# EAGLE board 00A-022 FRDM Protoboard (EAGLE 6.3)
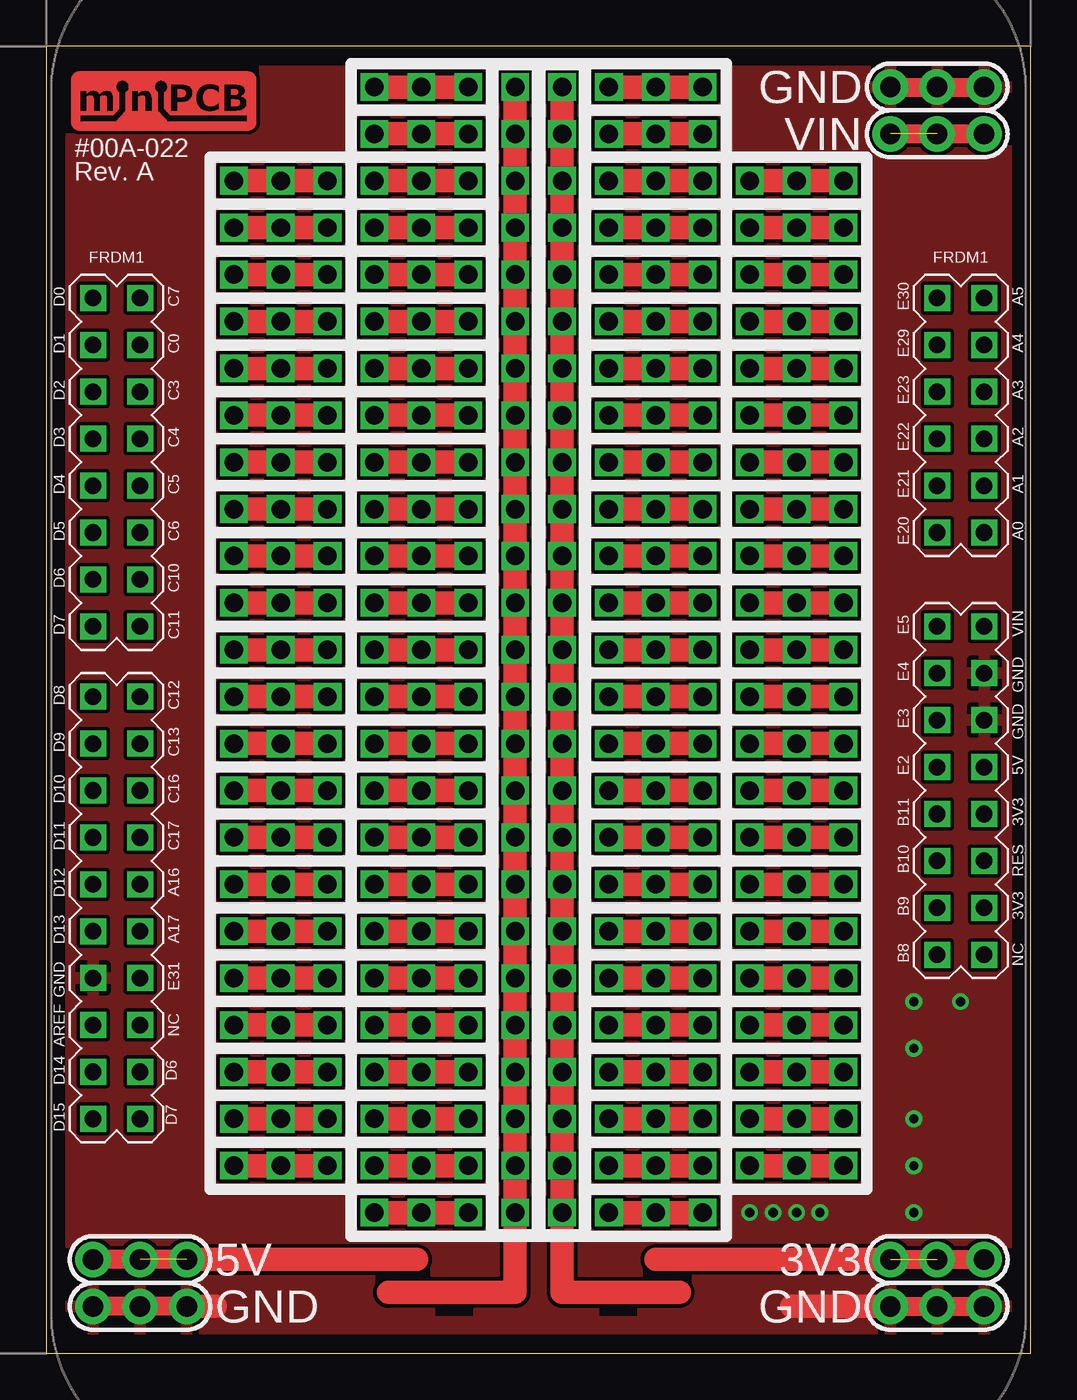
[diagram p0: board, top side]
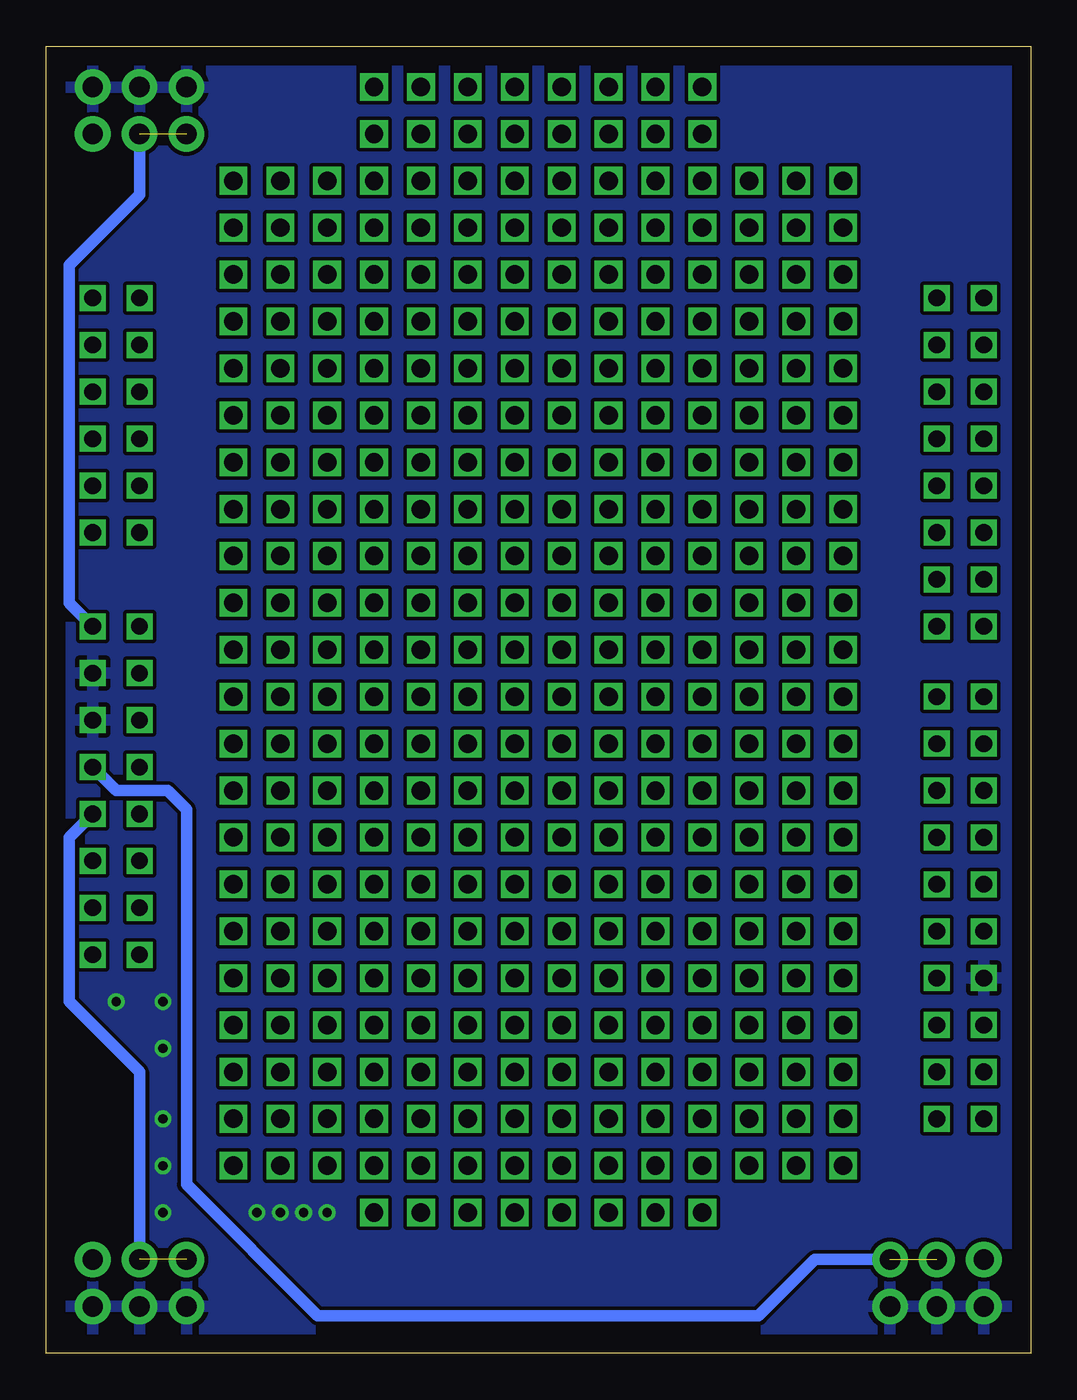
[diagram p1: board, bottom side, seen from below]

Size 53.32 x 70.79 mm. Coordinates in mm from the lower left corner, seen from the top.
Outline: 0,0 53.32,0 53.32,70.79 0,70.79 0,0
Copper layers (1*16): Top 0.035mm / dielectric 1.5mm / Bottom 0.035mm
Design rules "default": minimum track width 10mil, minimum drill 24mil, track to track 8mil, track to pad 8mil, pad to pad 8mil, via to via 8mil, smd to smd 8mil, copper to edge 40mil, drill to drill 8mil, minimum pad ring 10mil, minimum via ring 8mil, stop-mask expansion 4mil, vias tented up to drill 0mil, thermal gap 10mil
tRestrict: area 30,2 to 32,2.3; area 21.1,2 to 23.1,2.3

## Footprints (pad centres in the part's own frame; a part is rotated, then mirrored left to right if it is on the bottom)
FRDM_KL25Z_NORMAL = drill 0.9 square: 3V3 24.13,-15.24; 5V 24.13,-7.62; A0 24.13,5.08; A1 24.13,7.62; A2 24.13,10.16; A3 24.13,12.7; A4 24.13,15.24; A5 24.13,17.78; AREF -24.13,-21.59; D0 -24.13,17.78; D1 -24.13,15.24; D2 -24.13,12.7; D3 -24.13,10.16; D4 -24.13,7.62; D5 -24.13,5.08; D6 -24.13,2.54; D7 -24.13,0; D8 -24.13,-3.81; D9 -24.13,-6.35; D10 -24.13,-8.89; D11 -24.13,-11.43; D12 -24.13,-13.97; D13 -24.13,-16.51; D14 -24.13,-24.13; D15 -24.13,-26.67; GND0 24.13,-2.54; GND1 24.13,-5.08; GND2 -24.13,-19.05; NC1 24.13,-17.78; NC2 -21.59,-21.59; P3V3 24.13,-10.16; PTA16 -21.59,-13.97; PTA17 -21.59,-16.51; PTB8 21.59,-17.78; PTB9 21.59,-15.24; PTB10 21.59,-12.7; PTB11 21.59,-10.16; PTC0 -21.59,15.24; PTC3 -21.59,12.7; PTC4 -21.59,10.16; PTC5 -21.59,7.62; PTC6 -21.59,5.08; PTC7 -21.59,17.78; PTC10 -21.59,2.54; PTC11 -21.59,0; PTC12 -21.59,-3.81; PTC13 -21.59,-6.35; PTC16 -21.59,-8.89; PTC17 -21.59,-11.43; PTD6 -21.59,-24.13; PTD7 -21.59,-26.67; PTE2 21.59,-7.62; PTE3 21.59,-5.08; PTE4 21.59,-2.54; PTE5 21.59,0; PTE20 21.59,5.08; PTE21 21.59,7.62; PTE22 21.59,10.16; PTE23 21.59,12.7; PTE29 21.59,15.24; PTE30 21.59,17.78; PTE31 -21.59,-19.05; RESET 24.13,-12.7; VIN 24.13,0
PINS_1-3P_VALUE = drill 1.1 pad 1.93: 1 0,0; 2 2.54,0; 3 5.08,0

## Placement (x,y rotation side)
FRDM1  FRDM-KL25ZNORMAL  [FRDM_KL25Z_NORMAL]  26.67,39.37 0 top
P57  3V3  [PINS_1-3P_VALUE]  45.72,5.08 0 top
P58  5V  [PINS_1-3P_VALUE]  7.62,5.08 180 top
P59  VIN  [PINS_1-3P_VALUE]  45.72,66.04 0 top
P102  GND  [PINS_1-3P_VALUE]  45.72,2.54 0 top
P103  GND  [PINS_1-3P_VALUE]  7.62,2.54 180 top
P114  GND  [PINS_1-3P_VALUE]  45.72,68.58 0 top
U$1  MINIPCB_LOGO  [MINIPCB-LOGO]  6.35,67.82 0 top

## Library data of the parts
FRDM1 = nolan; AVAILABILITY: In Stock; DESCRIPTION: KL1x, KL2x, mbed-Enabled Development Freedom Kinetis ARM® Cortex®-M0+ MCU 32-Bit Embedded Evaluation Board; MF: NXP USA; MP: FRDM-KL25Z; PACKAGE: 0805 Freescale Semiconductor; PRICE: None; PURCHASE-URL: https://pricing.snapeda.com/search/part/FRDM-KL25Z/?ref=eda
P57-P59 P102 P103 P114 U$1 = nolan

## Nets
GND: FRDM1.GND0 FRDM1.GND1 FRDM1.GND2 P102.1 P102.2 P102.3 P103.1 P103.2 P103.3 P114.1 P114.2 P114.3
N$57: FRDM1.P3V3 P57.1 P57.2 P57.3
N$58: FRDM1.5V P58.1 P58.2 P58.3
N$59: FRDM1.VIN P59.1 P59.2 P59.3

## Tracks (layer width: path | path; a pad name or v marks a point on that pad's centre or on a via)
GND  (via drill 0.5)
  Top 1.27: P102.1 40.39,2.54 | P103.1 9.14,2.54
  other vias: 38.1,7.62 39.37,7.62 40.64,7.62 41.91,7.62 46.99,7.62 46.99,10.16 46.99,12.7 46.99,19.05 49.53,19.05 46.99,16.51
  pour Top: 1.27,1.27 52.07,1.27 52.07,69.85 1.27,69.85
  pour Bottom: 1.27,1.27 52.07,1.27 52.07,69.85 1.27,69.85
N$1  (via drill 1)
  Top 1.27: v27.94,68.58 v27.94,66.04 v27.94,7.62 27.94,3.3 34.29,3.3
N$2  (via drill 1)
  other vias: 27.94,63.5
N$3  (via drill 1)
  other vias: 27.94,60.96
N$4  (via drill 1)
  other vias: 27.94,58.42
N$5  (via drill 1)
  other vias: 27.94,55.88
N$6  (via drill 1)
  other vias: 27.94,53.34
N$7  (via drill 1)
  other vias: 27.94,50.8
N$8  (via drill 1)
  other vias: 27.94,48.26
N$9  (via drill 1)
  other vias: 27.94,45.72
N$10  (via drill 1)
  other vias: 27.94,43.18
N$11  (via drill 1)
  other vias: 27.94,40.64
N$12  (via drill 1)
  other vias: 27.94,38.1
N$13  (via drill 1)
  other vias: 27.94,35.56
N$14  (via drill 1)
  other vias: 27.94,33.02
N$15  (via drill 1)
  other vias: 27.94,30.48
N$16  (via drill 1)
  other vias: 27.94,27.94
N$17  (via drill 1)
  other vias: 27.94,25.4
N$18  (via drill 1)
  other vias: 27.94,22.86
N$19  (via drill 1)
  other vias: 27.94,20.32
N$20  (via drill 1)
  Top 1.27: v25.4,68.58 v25.4,66.04 v25.4,7.62 25.4,3.3 18.54,3.3
N$21  (via drill 1)
  other vias: 27.94,15.24
N$22  (via drill 1)
  other vias: 27.94,12.7
N$23  (via drill 1)
  other vias: 27.94,10.16
N$25  (via drill 1)
  other vias: 25.4,63.5
N$26  (via drill 1)
  other vias: 27.94,17.78
N$27  (via drill 1)
  other vias: 25.4,60.96
N$28  (via drill 1)
  other vias: 25.4,58.42
N$29  (via drill 1)
  other vias: 25.4,55.88
N$30  (via drill 1)
  other vias: 25.4,53.34
N$31  (via drill 1)
  other vias: 25.4,50.8
N$32  (via drill 1)
  other vias: 25.4,48.26
N$33  (via drill 1)
  other vias: 25.4,45.72
N$34  (via drill 1)
  other vias: 25.4,43.18
N$35  (via drill 1)
  other vias: 25.4,40.64
N$36  (via drill 1)
  other vias: 25.4,38.1
N$37  (via drill 1)
  other vias: 25.4,35.56
N$38  (via drill 1)
  other vias: 25.4,33.02
N$39  (via drill 1)
  other vias: 25.4,30.48
N$40  (via drill 1)
  other vias: 25.4,27.94
N$41  (via drill 1)
  other vias: 25.4,25.4
N$42  (via drill 1)
  other vias: 25.4,22.86
N$43  (via drill 1)
  other vias: 25.4,20.32
N$44  (via drill 1)
  other vias: 25.4,15.24
N$45  (via drill 1)
  other vias: 25.4,12.7
N$46  (via drill 1)
  other vias: 25.4,10.16
N$48  (via drill 1)
  other vias: 25.4,17.78
N$49  (via drill 1)
  Top 1.27: v30.48,63.5 v35.56,63.5
N$50  (via drill 1)
  other vias: 33.02,63.5
N$51  (via drill 1)
  Top 1.27: v38.1,63.5 v43.18,63.5
N$52  (via drill 1)
  Top 1.27: v17.78,63.5 v22.86,63.5
N$53  (via drill 1)
  Top 1.27: v30.48,60.96 v35.56,60.96
N$54  (via drill 1)
  other vias: 33.02,60.96
N$55  (via drill 1)
  other vias: 40.64,63.5
N$56  (via drill 1)
  other vias: 20.32,63.5
N$57  (1 unrouted)
  Top 1.27: P57.1 33.02,5.08
  Bottom 0.61: FRDM1.P3V3 52.07,27.94 52.07,19.05 48.26,15.24 P57.2
N$58  (1 unrouted)
  Top 1.27: P58.1 20.07,5.08
  Bottom 0.61: FRDM1.5V 49.53,30.48 46.74,30.48 45.72,29.46 45.72,9.14 38.61,2.03 14.73,2.03 11.68,5.08 P58.1
N$59  (1 unrouted)
  Bottom 0.61: FRDM1.VIN 52.07,40.64 52.07,58.93 48.26,62.74 P59.2
N$60  (via drill 1)
  Top 1.27: v30.48,58.42 v35.56,58.42
N$61  (via drill 1)
  other vias: 33.02,58.42
N$62  (via drill 1)
  Top 1.27: v38.1,60.96 v43.18,60.96
N$63  (via drill 1)
  Top 1.27: v17.78,60.96 v22.86,60.96
N$64  (via drill 1)
  Top 1.27: v30.48,55.88 v35.56,55.88
N$65  (via drill 1)
  other vias: 33.02,55.88
N$66  (via drill 1)
  other vias: 40.64,60.96
N$67  (via drill 1)
  other vias: 20.32,60.96
N$68  (via drill 1)
  Top 1.27: v30.48,53.34 v35.56,53.34
N$69  (via drill 1)
  other vias: 33.02,53.34
N$70  (via drill 1)
  Top 1.27: v38.1,58.42 v43.18,58.42
N$71  (via drill 1)
  Top 1.27: v17.78,58.42 v22.86,58.42
N$72  (via drill 1)
  Top 1.27: v30.48,50.8 v35.56,50.8
N$73  (via drill 1)
  other vias: 33.02,50.8
N$74  (via drill 1)
  other vias: 40.64,58.42
N$75  (via drill 1)
  Top 1.27: v30.48,48.26 v35.56,48.26
N$76  (via drill 1)
  other vias: 33.02,48.26
N$77  (via drill 1)
  Top 1.27: v38.1,55.88 v43.18,55.88
N$78  (via drill 1)
  Top 1.27: v30.48,45.72 v35.56,45.72
N$79  (via drill 1)
  other vias: 33.02,45.72
N$80  (via drill 1)
  other vias: 40.64,55.88
N$81  (via drill 1)
  Top 1.27: v30.48,43.18 v35.56,43.18
N$82  (via drill 1)
  other vias: 33.02,43.18
N$83  (via drill 1)
  Top 1.27: v38.1,53.34 v43.18,53.34
N$84  (via drill 1)
  Top 1.27: v30.48,40.64 v35.56,40.64
N$85  (via drill 1)
  other vias: 33.02,40.64
N$86  (via drill 1)
  other vias: 40.64,53.34
N$87  (via drill 1)
  Top 1.27: v30.48,38.1 v35.56,38.1
N$88  (via drill 1)
  other vias: 33.02,38.1
N$89  (via drill 1)
  Top 1.27: v38.1,50.8 v43.18,50.8
N$90  (via drill 1)
  Top 1.27: v30.48,35.56 v35.56,35.56
N$91  (via drill 1)
  other vias: 33.02,35.56
N$92  (via drill 1)
  other vias: 40.64,50.8
N$93  (via drill 1)
  Top 1.27: v30.48,33.02 v35.56,33.02
N$94  (via drill 1)
  other vias: 33.02,33.02
N$95  (via drill 1)
  Top 1.27: v38.1,48.26 v43.18,48.26
N$96  (via drill 1)
  Top 1.27: v30.48,30.48 v35.56,30.48
N$97  (via drill 1)
  other vias: 33.02,30.48
N$98  (via drill 1)
  other vias: 40.64,48.26
N$99  (via drill 1)
  Top 1.27: v30.48,27.94 v35.56,27.94
N$100  (via drill 1)
  other vias: 33.02,27.94
N$101  (via drill 1)
  Top 1.27: v38.1,45.72 v43.18,45.72
N$102  (via drill 1)
  Top 1.27: v30.48,25.4 v35.56,25.4
N$103  (via drill 1)
  other vias: 33.02,25.4
N$104  (via drill 1)
  other vias: 40.64,45.72
N$105  (via drill 1)
  Top 1.27: v30.48,22.86 v35.56,22.86
N$106  (via drill 1)
  other vias: 33.02,22.86
N$107  (via drill 1)
  Top 1.27: v38.1,43.18 v43.18,43.18
N$108  (via drill 1)
  Top 1.27: v30.48,20.32 v35.56,20.32
N$109  (via drill 1)
  other vias: 33.02,20.32
N$110  (via drill 1)
  other vias: 40.64,43.18
N$111  (via drill 1)
  Top 1.27: v30.48,17.78 v35.56,17.78
N$112  (via drill 1)
  other vias: 33.02,17.78
N$113  (via drill 1)
  Top 1.27: v38.1,40.64 v43.18,40.64
N$114  (via drill 1)
  Top 1.27: v30.48,15.24 v35.56,15.24
N$115  (via drill 1)
  other vias: 33.02,15.24
N$116  (via drill 1)
  other vias: 40.64,40.64
N$117  (via drill 1)
  other vias: 20.32,58.42
N$118  (via drill 1)
  Top 1.27: v17.78,55.88 v22.86,55.88
N$119  (via drill 1)
  other vias: 20.32,55.88
N$120  (via drill 1)
  Top 1.27: v17.78,53.34 v22.86,53.34
N$121  (via drill 1)
  other vias: 20.32,53.34
N$122  (via drill 1)
  Top 1.27: v17.78,50.8 v22.86,50.8
N$123  (via drill 1)
  other vias: 20.32,50.8
N$124  (via drill 1)
  Top 1.27: v17.78,48.26 v22.86,48.26
N$125  (via drill 1)
  other vias: 20.32,48.26
N$126  (via drill 1)
  Top 1.27: v17.78,45.72 v22.86,45.72
N$127  (via drill 1)
  other vias: 20.32,45.72
N$128  (via drill 1)
  Top 1.27: v17.78,43.18 v22.86,43.18
N$129  (via drill 1)
  other vias: 20.32,43.18
N$130  (via drill 1)
  Top 1.27: v17.78,40.64 v22.86,40.64
N$131  (via drill 1)
  other vias: 20.32,40.64
N$132  (via drill 1)
  Top 1.27: v17.78,38.1 v22.86,38.1
N$133  (via drill 1)
  other vias: 20.32,38.1
N$134  (via drill 1)
  Top 1.27: v17.78,35.56 v22.86,35.56
N$135  (via drill 1)
  other vias: 20.32,35.56
N$136  (via drill 1)
  Top 1.27: v17.78,33.02 v22.86,33.02
N$137  (via drill 1)
  other vias: 20.32,33.02
N$138  (via drill 1)
  Top 1.27: v17.78,30.48 v22.86,30.48
N$139  (via drill 1)
  other vias: 20.32,30.48
N$140  (via drill 1)
  Top 1.27: v17.78,27.94 v22.86,27.94
N$141  (via drill 1)
  other vias: 20.32,27.94
N$142  (via drill 1)
  Top 1.27: v17.78,25.4 v22.86,25.4
N$143  (via drill 1)
  other vias: 20.32,25.4
N$144  (via drill 1)
  Top 1.27: v17.78,22.86 v22.86,22.86
N$145  (via drill 1)
  other vias: 20.32,22.86
N$146  (via drill 1)
  Top 1.27: v17.78,20.32 v22.86,20.32
N$147  (via drill 1)
  other vias: 20.32,20.32
N$148  (via drill 1)
  Top 1.27: v17.78,17.78 v22.86,17.78
N$149  (via drill 1)
  other vias: 20.32,17.78
N$150  (via drill 1)
  Top 1.27: v17.78,15.24 v22.86,15.24
N$151  (via drill 1)
  other vias: 20.32,15.24
N$152  (via drill 1)
  Top 1.27: v10.16,63.5 v15.24,63.5
N$153  (via drill 1)
  other vias: 12.7,63.5
N$154  (via drill 1)
  Top 1.27: v10.16,60.96 v15.24,60.96
N$155  (via drill 1)
  other vias: 12.7,60.96
N$156  (via drill 1)
  Top 1.27: v10.16,58.42 v15.24,58.42
N$157  (via drill 1)
  other vias: 12.7,58.42
N$158  (via drill 1)
  Top 1.27: v10.16,55.88 v15.24,55.88
N$159  (via drill 1)
  other vias: 12.7,55.88
N$160  (via drill 1)
  Top 1.27: v10.16,53.34 v15.24,53.34
N$161  (via drill 1)
  other vias: 12.7,53.34
N$162  (via drill 1)
  Top 1.27: v10.16,50.8 v15.24,50.8
N$163  (via drill 1)
  other vias: 12.7,50.8
N$164  (via drill 1)
  Top 1.27: v10.16,48.26 v15.24,48.26
N$165  (via drill 1)
  other vias: 12.7,48.26
N$166  (via drill 1)
  Top 1.27: v10.16,45.72 v15.24,45.72
N$167  (via drill 1)
  other vias: 12.7,45.72
N$168  (via drill 1)
  Top 1.27: v10.16,43.18 v15.24,43.18
N$169  (via drill 1)
  other vias: 12.7,43.18
N$170  (via drill 1)
  Top 1.27: v10.16,40.64 v15.24,40.64
N$171  (via drill 1)
  other vias: 12.7,40.64
N$172  (via drill 1)
  Top 1.27: v10.16,38.1 v15.24,38.1
N$173  (via drill 1)
  other vias: 12.7,38.1
N$174  (via drill 1)
  Top 1.27: v10.16,35.56 v15.24,35.56
N$175  (via drill 1)
  other vias: 12.7,35.56
N$176  (via drill 1)
  Top 1.27: v10.16,33.02 v15.24,33.02
N$177  (via drill 1)
  other vias: 12.7,33.02
N$178  (via drill 1)
  Top 1.27: v10.16,30.48 v15.24,30.48
N$179  (via drill 1)
  other vias: 12.7,30.48
N$180  (via drill 1)
  Top 1.27: v10.16,27.94 v15.24,27.94
N$181  (via drill 1)
  other vias: 12.7,27.94
N$182  (via drill 1)
  Top 1.27: v10.16,25.4 v15.24,25.4
N$183  (via drill 1)
  other vias: 12.7,25.4
N$184  (via drill 1)
  Top 1.27: v10.16,22.86 v15.24,22.86
N$185  (via drill 1)
  other vias: 12.7,22.86
N$186  (via drill 1)
  Top 1.27: v10.16,20.32 v15.24,20.32
N$187  (via drill 1)
  other vias: 12.7,20.32
N$188  (via drill 1)
  Top 1.27: v10.16,17.78 v15.24,17.78
N$189  (via drill 1)
  other vias: 12.7,17.78
N$190  (via drill 1)
  Top 1.27: v10.16,15.24 v15.24,15.24
N$191  (via drill 1)
  other vias: 12.7,15.24
N$192  (via drill 1)
  Top 1.27: v38.1,38.1 v43.18,38.1
N$193  (via drill 1)
  other vias: 40.64,38.1
N$194  (via drill 1)
  Top 1.27: v38.1,35.56 v43.18,35.56
N$195  (via drill 1)
  other vias: 40.64,35.56
N$196  (via drill 1)
  Top 1.27: v38.1,33.02 v43.18,33.02
N$197  (via drill 1)
  other vias: 40.64,33.02
N$198  (via drill 1)
  Top 1.27: v38.1,30.48 v43.18,30.48
N$199  (via drill 1)
  other vias: 40.64,30.48
N$200  (via drill 1)
  Top 1.27: v38.1,27.94 v43.18,27.94
N$201  (via drill 1)
  other vias: 40.64,27.94
N$202  (via drill 1)
  Top 1.27: v38.1,25.4 v43.18,25.4
N$203  (via drill 1)
  other vias: 40.64,25.4
N$204  (via drill 1)
  Top 1.27: v38.1,22.86 v43.18,22.86
N$205  (via drill 1)
  other vias: 40.64,22.86
N$206  (via drill 1)
  Top 1.27: v38.1,20.32 v43.18,20.32
N$207  (via drill 1)
  other vias: 40.64,20.32
N$208  (via drill 1)
  Top 1.27: v38.1,17.78 v43.18,17.78
N$209  (via drill 1)
  other vias: 40.64,17.78
N$210  (via drill 1)
  Top 1.27: v38.1,15.24 v43.18,15.24
N$211  (via drill 1)
  other vias: 40.64,15.24
N$212  (via drill 1)
  Top 1.27: v17.78,12.7 v22.86,12.7
N$213  (via drill 1)
  other vias: 20.32,12.7
N$214  (via drill 1)
  Top 1.27: v17.78,10.16 v22.86,10.16
N$215  (via drill 1)
  other vias: 20.32,10.16
N$216  (via drill 1)
  Top 1.27: v17.78,7.62 v22.86,7.62
N$217  (via drill 1)
  other vias: 20.32,7.62
N$218  (via drill 1)
  Top 1.27: v10.16,12.7 v15.24,12.7
N$219  (via drill 1)
  other vias: 12.7,12.7
N$220  (via drill 1)
  Top 1.27: v10.16,10.16 v15.24,10.16
N$221  (via drill 1)
  other vias: 12.7,10.16
N$224  (via drill 1)
  Top 1.27: v38.1,12.7 v43.18,12.7
N$225  (via drill 1)
  other vias: 40.64,12.7
N$226  (via drill 1)
  Top 1.27: v38.1,10.16 v43.18,10.16
N$227  (via drill 1)
  other vias: 40.64,10.16
N$230  (via drill 1)
  Top 1.27: v30.48,12.7 v35.56,12.7
N$231  (via drill 1)
  other vias: 33.02,12.7
N$232  (via drill 1)
  Top 1.27: v30.48,10.16 v35.56,10.16
N$233  (via drill 1)
  other vias: 33.02,10.16
N$234  (via drill 1)
  Top 1.27: v30.48,7.62 v35.56,7.62
N$235  (via drill 1)
  other vias: 33.02,7.62
N$236  (via drill 1)
  Top 1.27: v17.78,68.58 v22.86,68.58
N$237  (via drill 1)
  other vias: 20.32,68.58
N$238  (via drill 1)
  Top 1.27: v17.78,66.04 v22.86,66.04
N$239  (via drill 1)
  other vias: 20.32,66.04
N$240  (via drill 1)
  Top 1.27: v30.48,68.58 v35.56,68.58
N$241  (via drill 1)
  other vias: 33.02,68.58
N$242  (via drill 1)
  Top 1.27: v30.48,66.04 v35.56,66.04
N$243  (via drill 1)
  other vias: 33.02,66.04

## Text on the board
tPlace: #00A-022 | Rev. A